# Altium PCB PCB1.PcbDoc
Units mil, origin at the board's own origin, x right, y up, seen from the top; angles counter-clockwise.
Board outline 1500 x 1500 mil, 4 copper layers (Top Layer, Int1 (GND), Int2 (GND), Bottom Layer), stack 53.912 mil thick; 25 components, 16 nets, 80 pads, 13 vias.
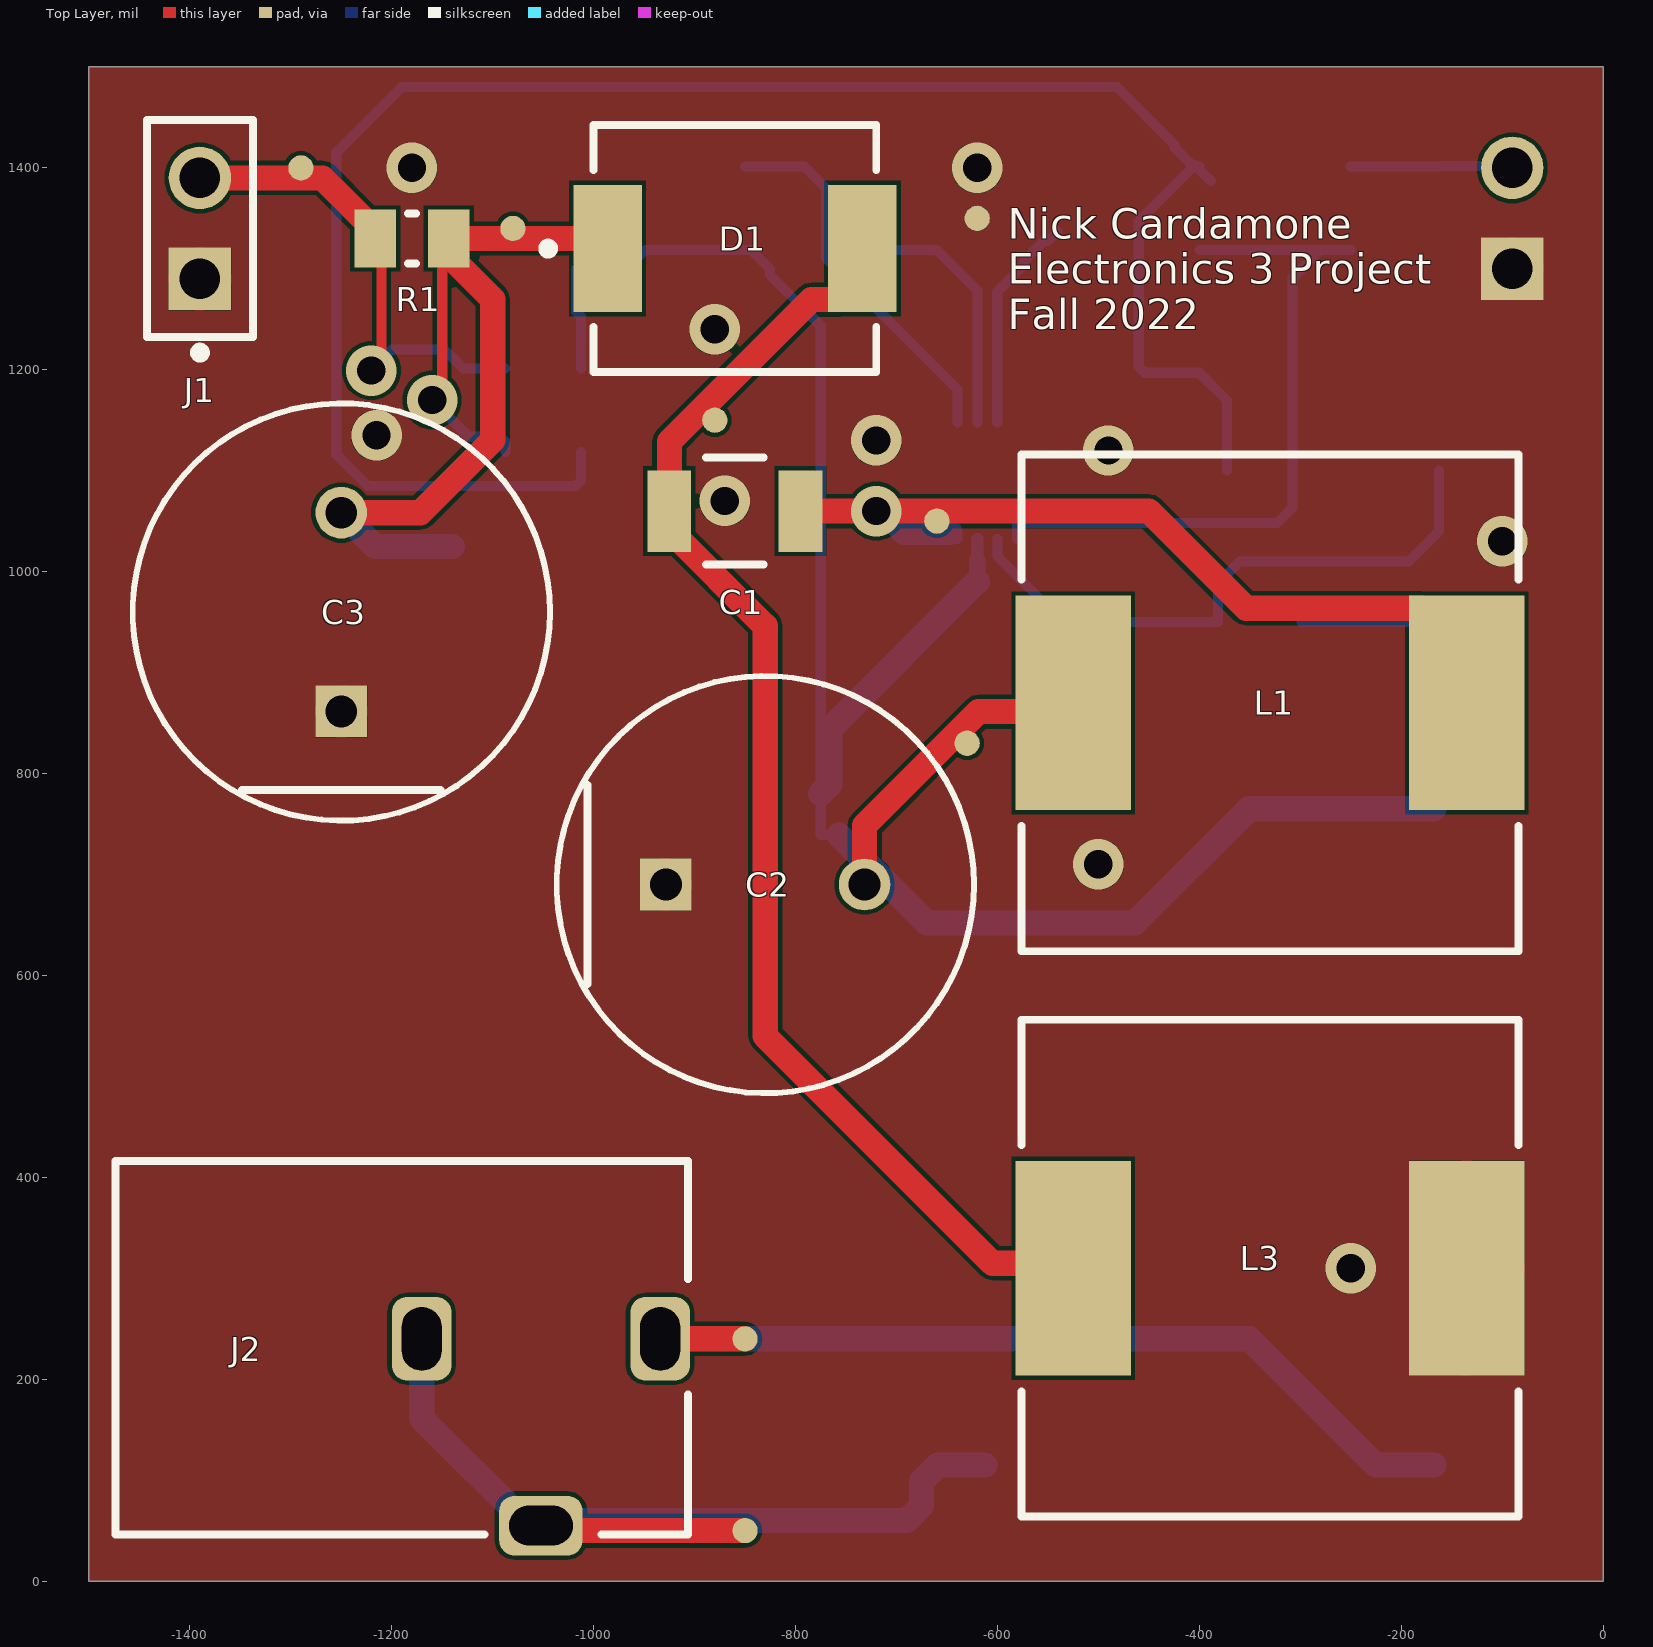
[diagram p0: Top Layer view]
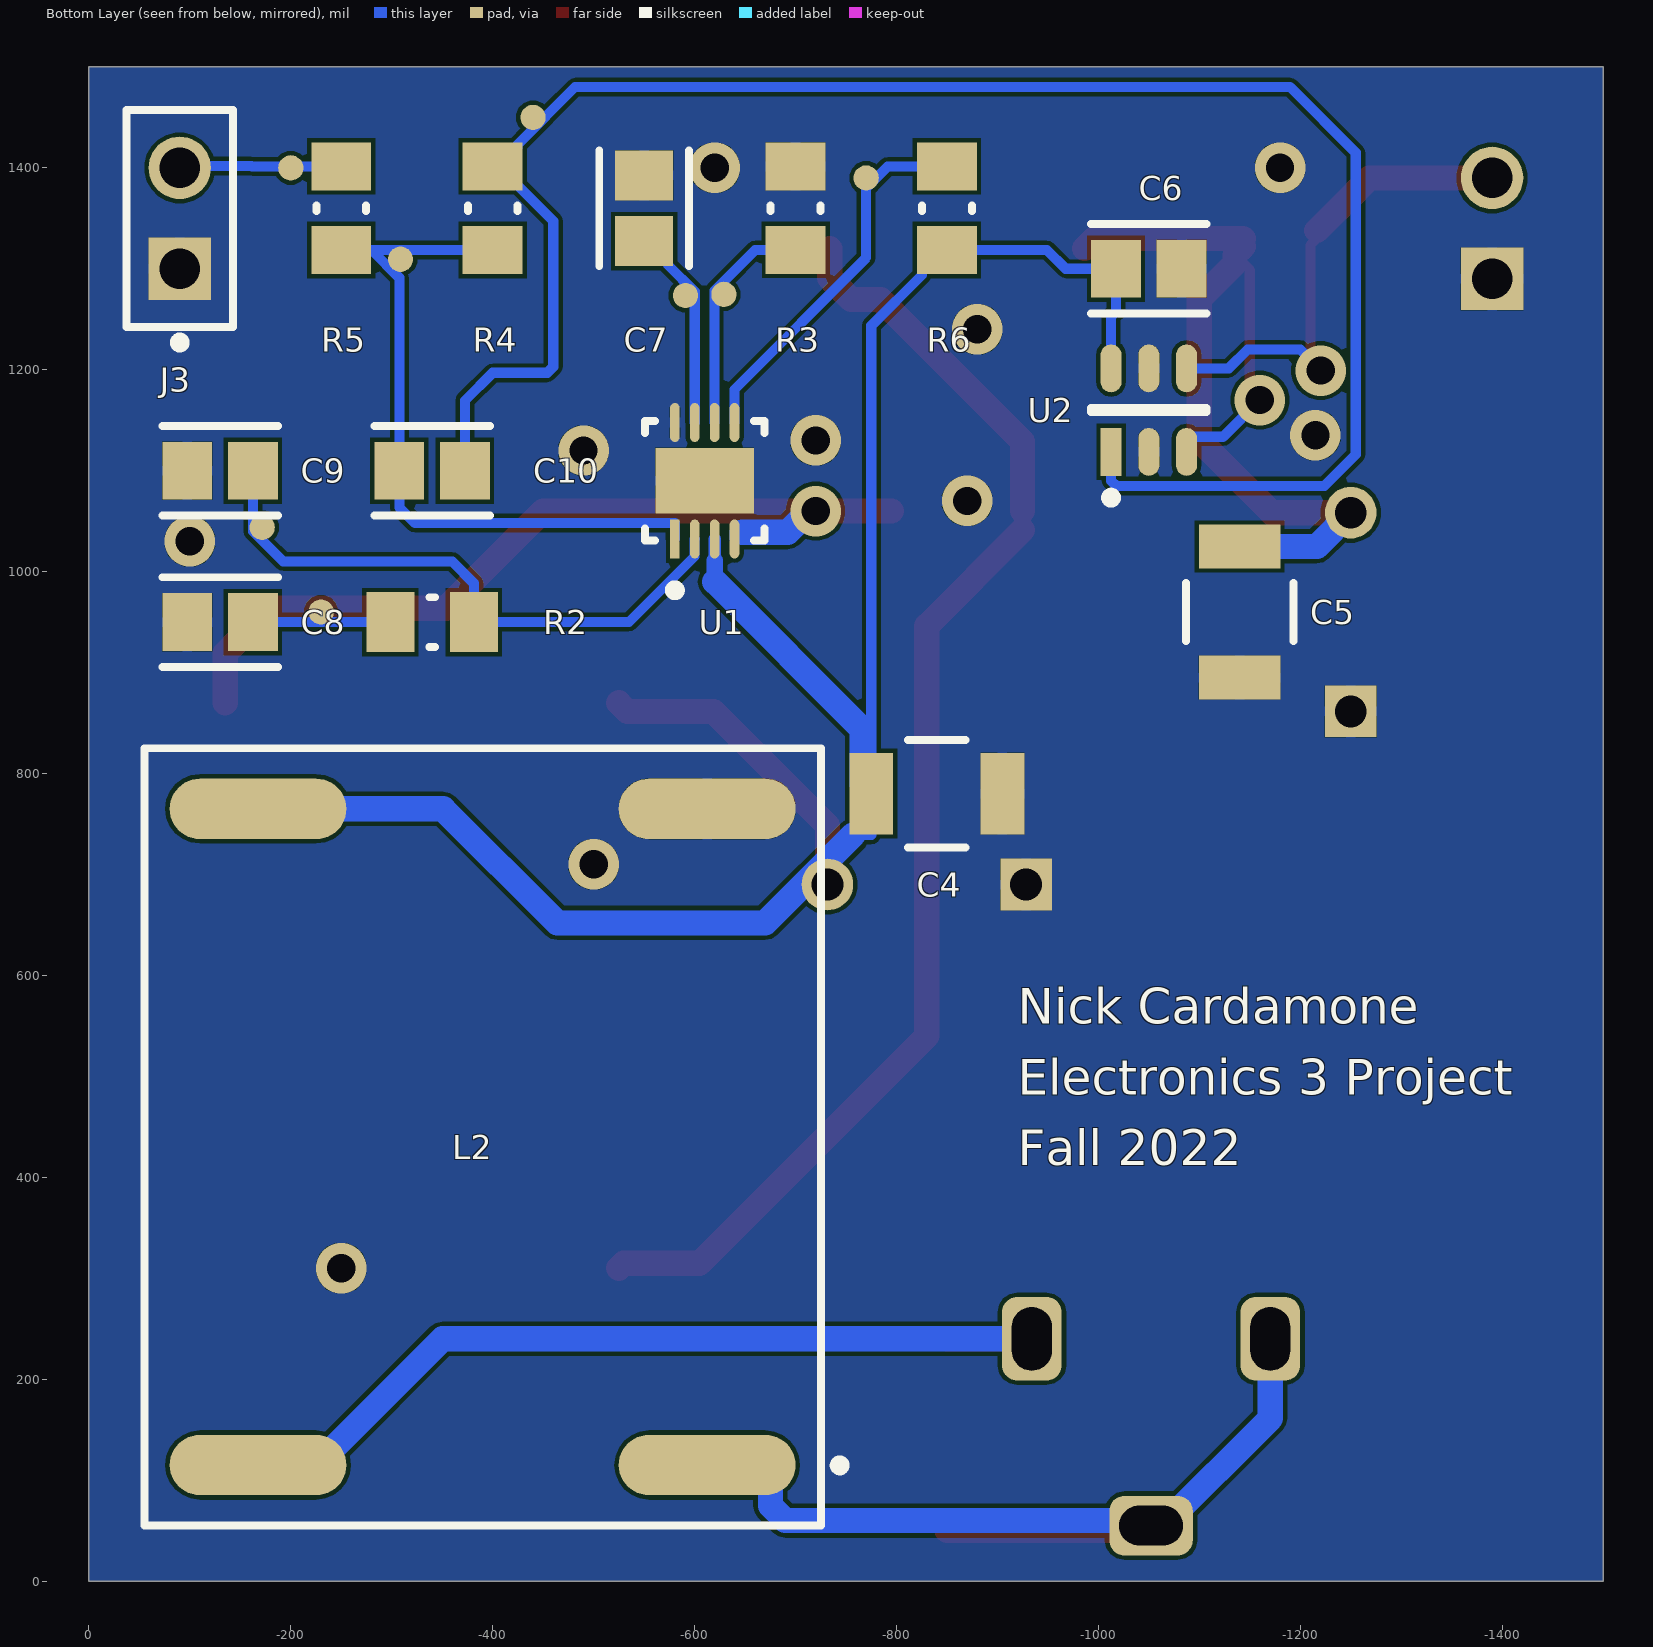
[diagram p1: Bottom Layer view, seen from below]
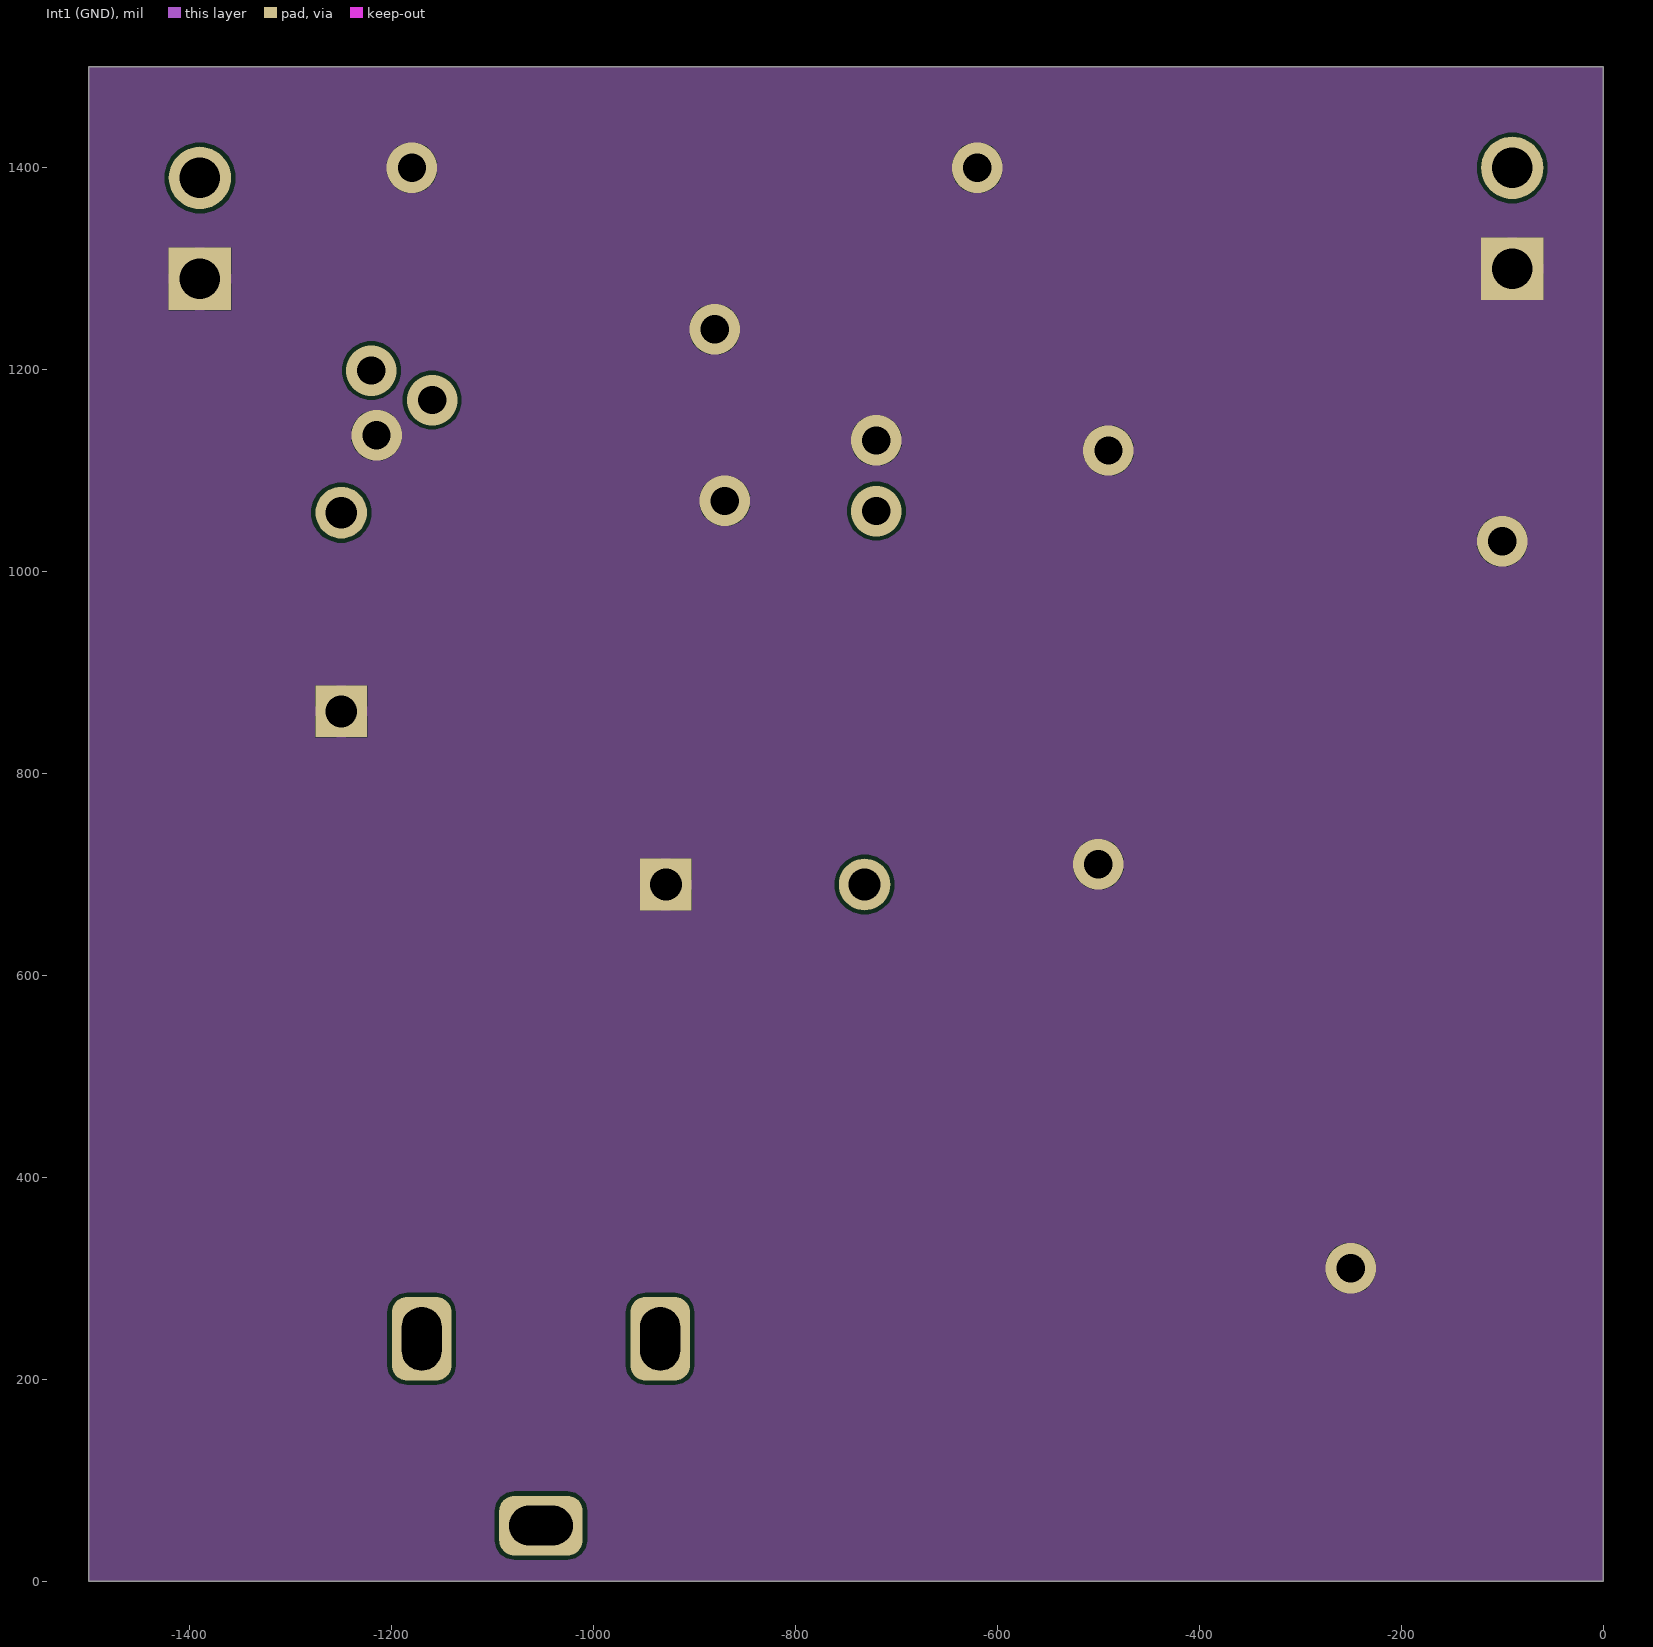
[diagram p2: Int1 (GND)]
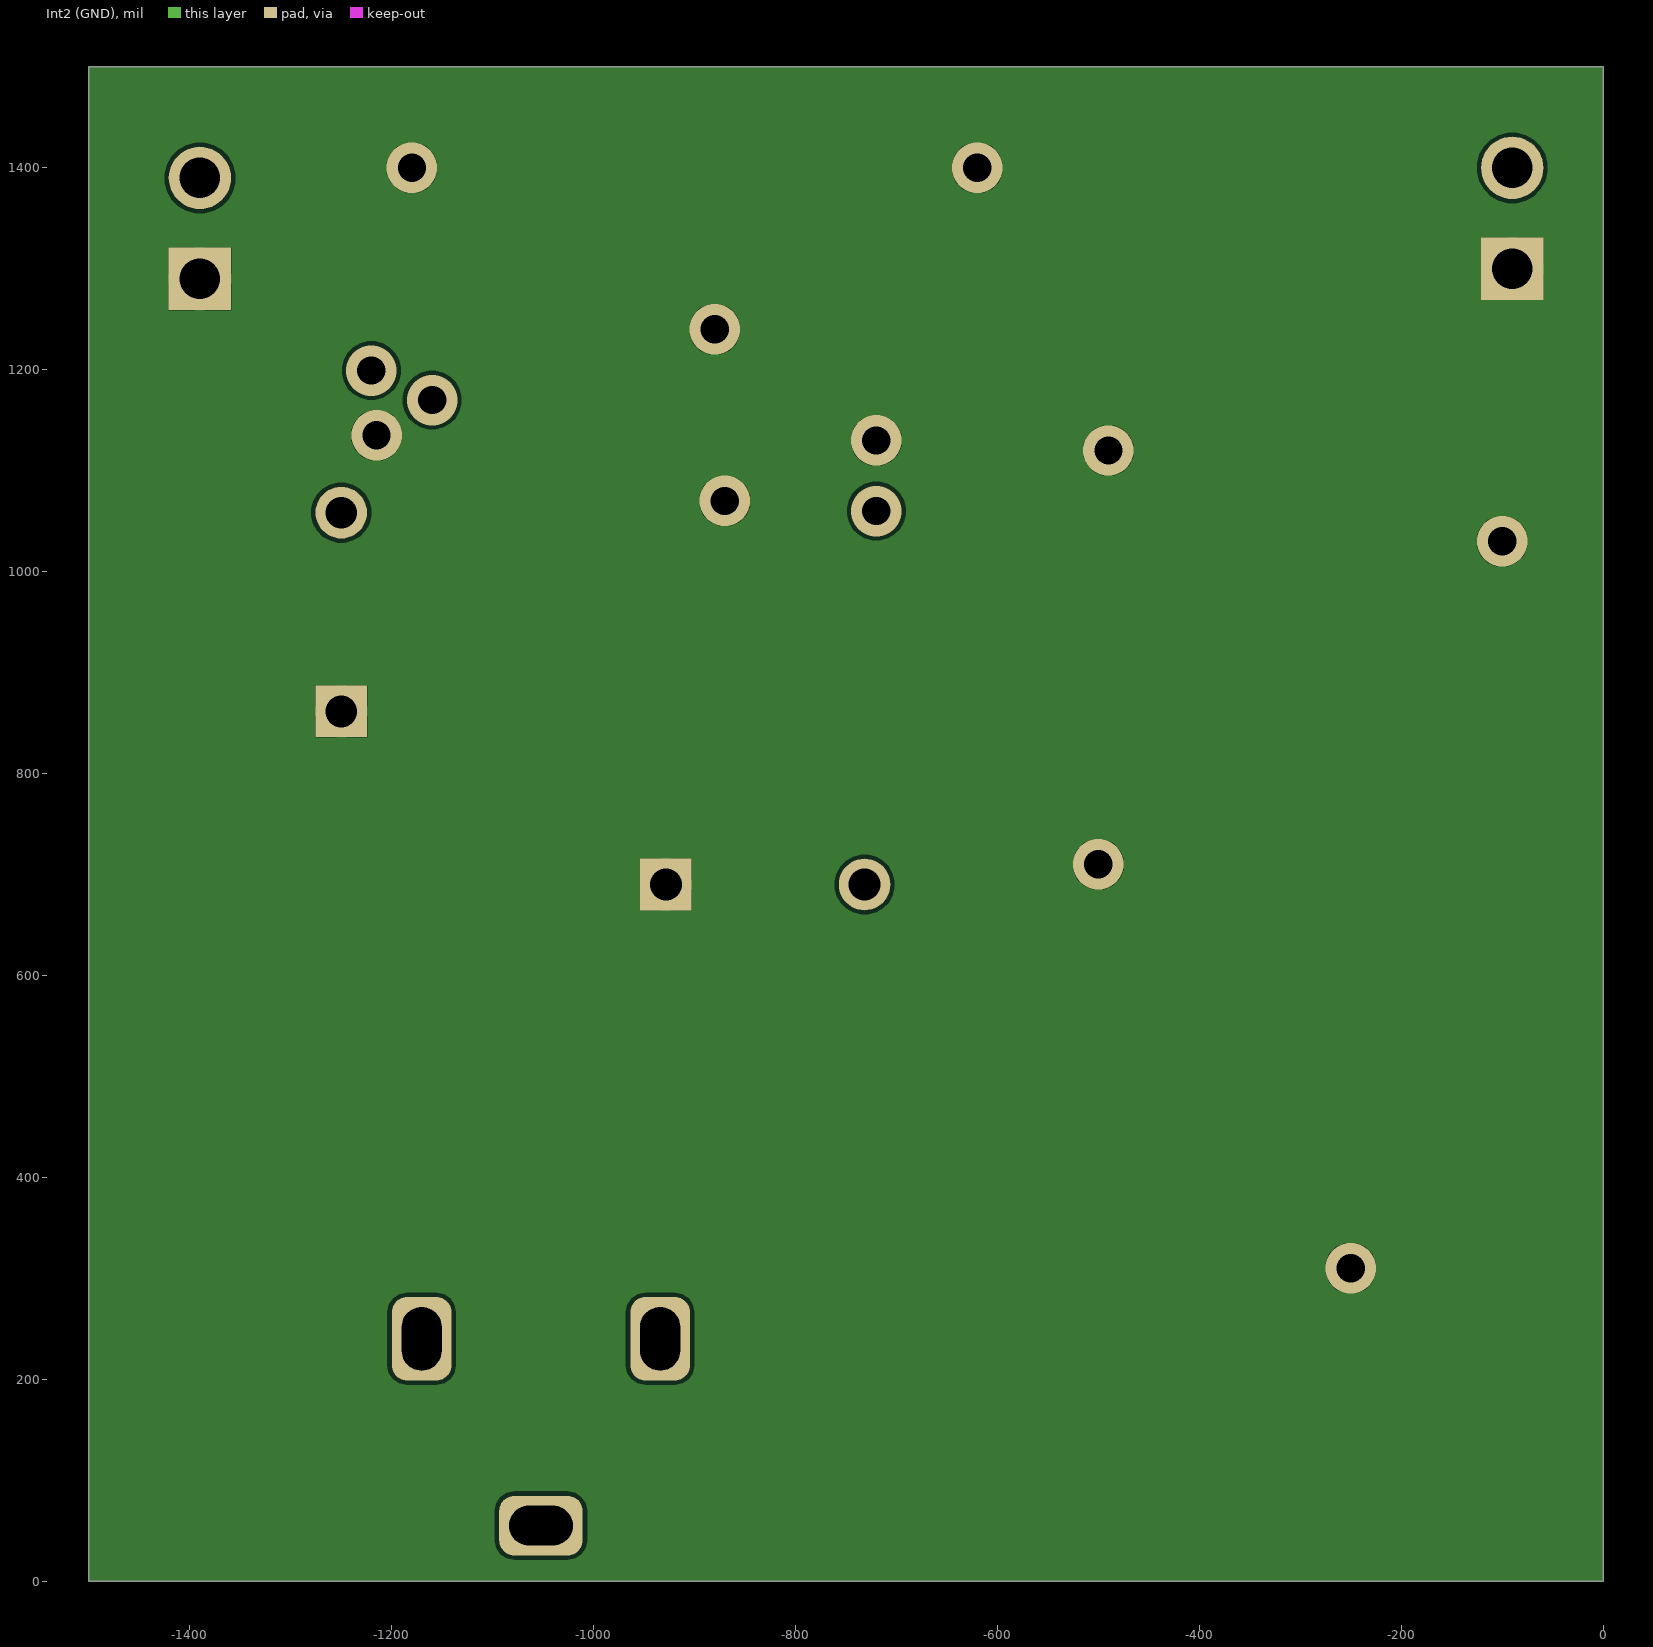
[diagram p3: Int2 (GND)]
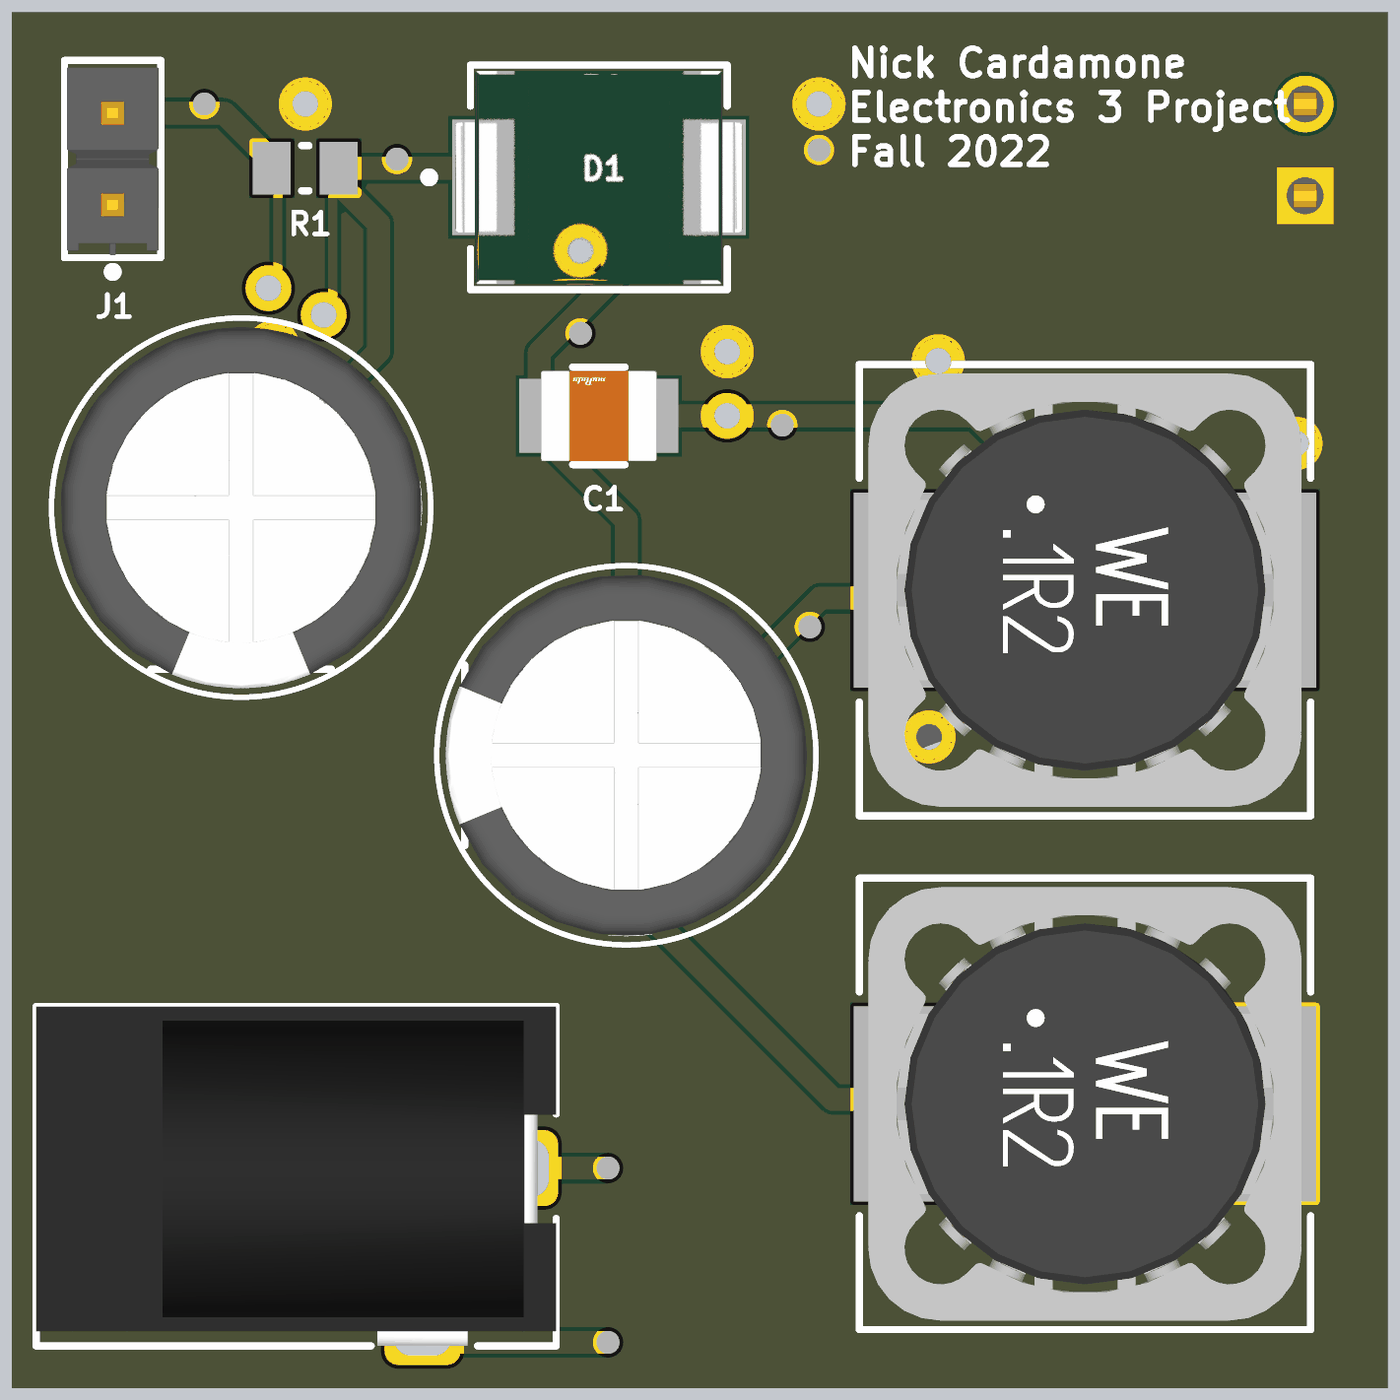
[diagram p4: 3D render of the assembled board from above, using the file's embedded part models]
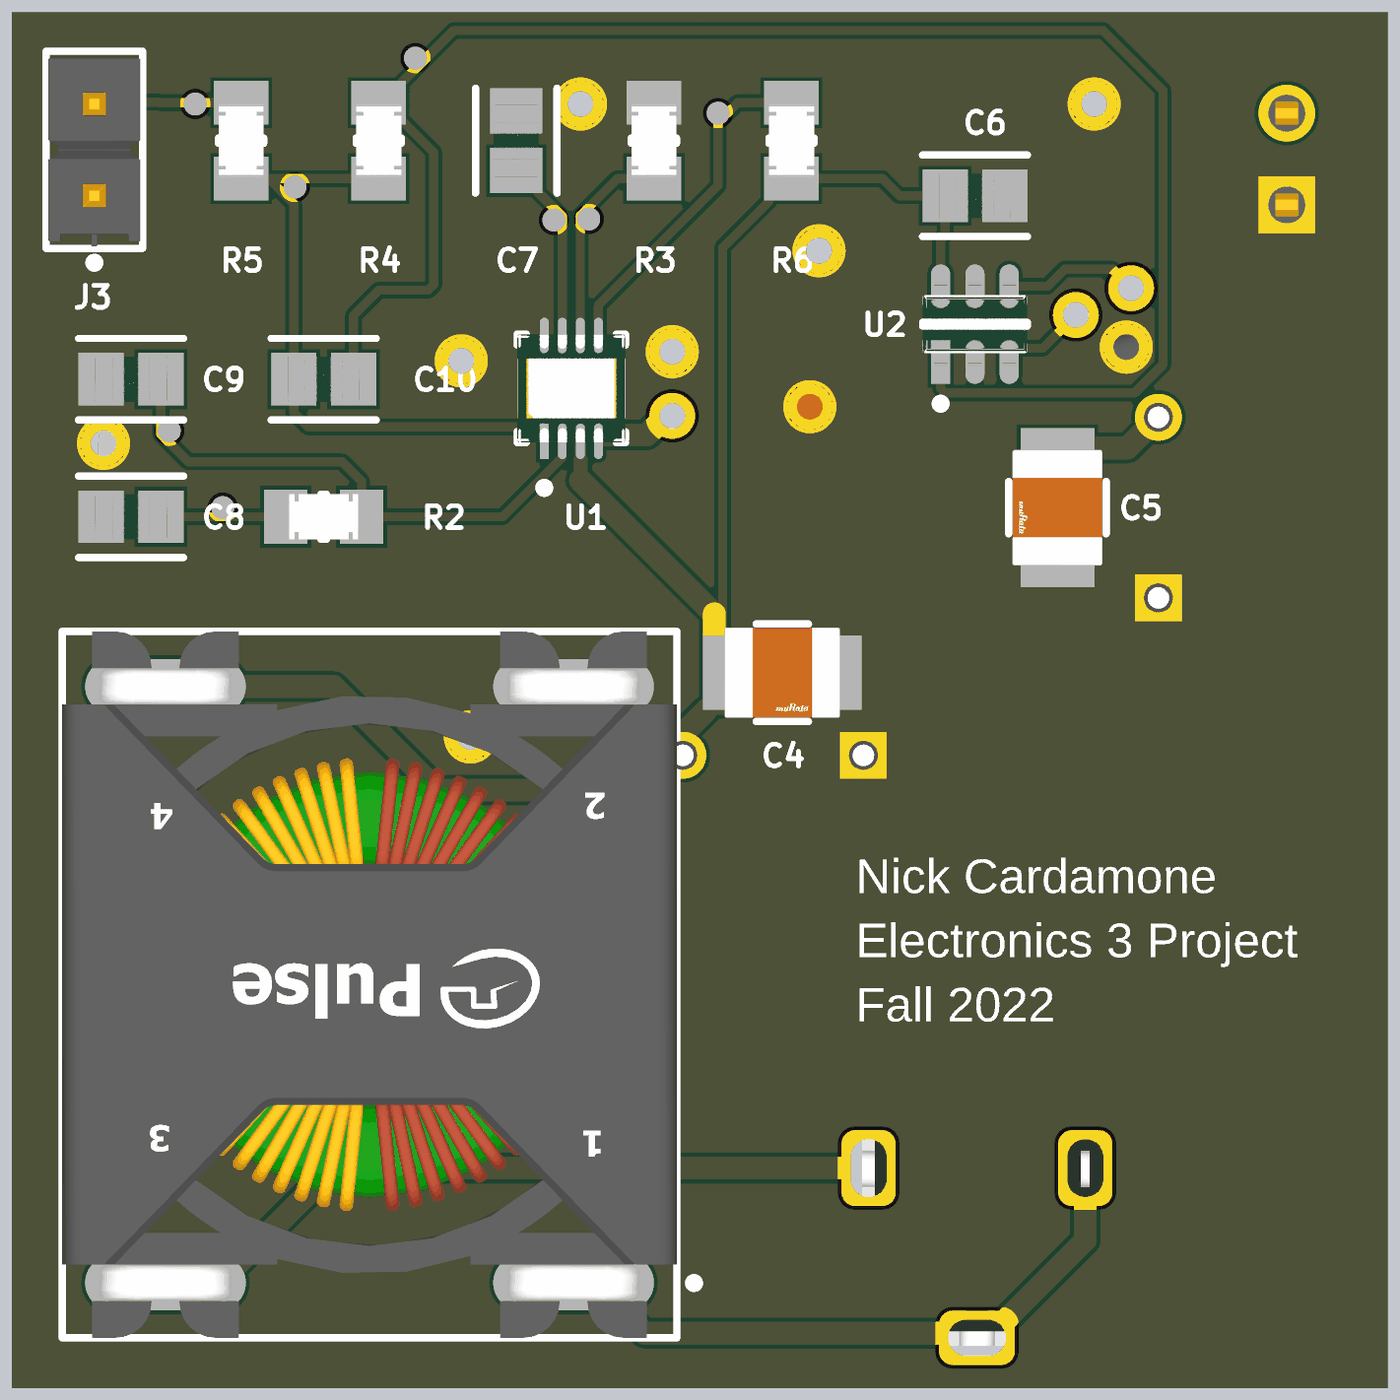
[diagram p5: 3D render of the assembled board from below, using the file's embedded part models]

## Layer stack, top to bottom
Top Solder: solder mask 1, SM-001, Dk 4
Top Layer: signal copper 1.378
Dielectric 1: prepreg 5.1, PP-017, Dk 4.3
Dielectric 2: prepreg 5.1, PP-017, Dk 4.3
Int1 (GND): signal copper 1.378
Dielectric 3: core 28, Core-039, Dk 4.8
Int2 (GND): signal copper 1.378
Dielectric 4: prepreg 5.1, PP-017, Dk 4.3
Dielectric 5: prepreg 5.1, PP-017, Dk 4.3
Bottom Layer: signal copper 1.378
Bottom Solder: solder mask 1, SM-001, Dk 4

## Board outline
-1500,0 -1500,1500 0,1500 0,0

## Design rules (kind name [scope] priority, off if disabled: settings)
Clearance [All] p1: gap=4 ignorepadtopadclearanceinfootprint=FALSE
PlaneConnect [All] p1 off: planeconnectstyle=Relief reliefexpansion=20 reliefentries=4 reliefconductorwidth=10 reliefairgap=10
PolygonConnect [All] p1 off: connectstyle=Relief reliefconductorwidth=10 reliefentries=4 polygonreliefangle="90 Angle" airgapwidth=10
RoomDefinition Sheet1 [InComponentClass('Sheet1')] p1: confinementstyle=ConfineIn formatcopy=TRUE lockcomponents=FALSE outline -1500,0 2500,0 2500,2000 -1500,2000
RoutingVias [All] p1: holewidth=28 width=50 viastyle="Through Hole" minholewidth=28 minwidth=50 maxholewidth=28 maxwidth=50
SolderMaskExpansion [All] p1: expansion=4 istentingtop=FALSE
Width [All] p1: maxlimit=100 minlimit=6 preferedwidth=10 midlayer1_minwidth=10 midlayer1_maxwidth=10 midlayer2_minwidth=10 midlayer2_maxwidth=10 minimp=50.000000 maximp=50.000000 favimp=50.000000
29 further rules are at their usual default settings.

## Components (designator, comment, footprint, x,y, rotation, side; value= is the part's Value field where it differs from the comment)
C1 "GRM32ER71J106KA12L" FP-GRM32E-0_2-0_3-MFG -860,1060 r180 top
C2 "EEUFR1H221B" FP-RAD-TH-D_10_0_5-L_16_1-MFG -830,690 r0 top
C3 "EEUFR1H221B" FP-RAD-TH-D_10_0_5-L_16_1-MFG -1250,960 r90 top
C4 "GRM32ER71J106KA12L" FP-GRM32E-0_2-0_3-MFG -840,780 r180 bottom
C5 "GRM32ER71J106KA12L" FP-GRM32E-0_2-0_3-MFG -1140,960 r270 bottom
C6 "CL21A226MQQNNNG" FP-CL21-IPC_B -1050,1300 r0 bottom
C7 "CL21A226MQQNNNG" FP-CL21-IPC_B -550,1360 r90 bottom
C8 "CL21A226MQQNNNG" FP-CL21-IPC_B -130,950 r0 bottom
C9 "CL21A226MQQNNNG" FP-CL21-IPC_B -130,1100 r0 bottom
C10 "CL21A226MQQNNNG" FP-CL21-IPC_B -340,1100 r180 bottom
D1 "ES3D-E3/57T" FP-95402-MFG -860,1320 r0 top value=45pF
J1 "TSW-102-07-L-S" FP-TSW-102-07-L-S-MFG -1390,1340 r90 top
J2 "PJ-102AH" "CUI PJ-102AH" -1190,240 r90 top
J3 "TSW-102-07-L-S" FP-TSW-102-07-L-S-MFG -90,1350 r90 bottom
L1 "744770233" WE-PD-XL -330,870 r0 top
L2 "P0351NLT" FP-P0351NLT-MFG -390,440 r0 bottom
L3 "744770233" WE-PD-XL -330,310 r0 top
R1 "CRCW080510R0FKEA" RESC2013X50X30NL20T20 -1180,1330 r180 top
R2 "CRCW080510K0FKEA" FP-CRCW0805-e3-IPC_A -340,950 r180 bottom
R3 "CRCW080510K0FKEA" FP-CRCW0805-e3-IPC_A -700,1360 r270 bottom
R4 "CRCW080510K0FKEA" FP-CRCW0805-e3-IPC_A -400,1360 r90 bottom
R5 "CRCW080510K0FKEA" FP-CRCW0805-e3-IPC_A -250,1360 r270 bottom
R6 "CRCW080510K0FKEA" FP-CRCW0805-e3-IPC_A -850,1360 r270 bottom
U1 "LT8570EDD-1#PBF" FP-DD-8-05-08-1698-IPC_A -610,1090 r90 bottom
U2 "INA181A2IDBVT" FP-DBV0006A-IPC_C -1050,1160 r90 bottom

## Footprints (in the part's own frame and the unit in brackets; to place one, negate y for a bottom-side part, rotate by r counter-clockwise, add the part's x,y. Pads: shape width x height; smd on the part's side, far side on the other; paste and mask are expansions set on the pad)
"CUI PJ-102AH" [mm] "DC Barrel Jack W/ Switch 2.0x5.5"
  rrect50% 2.1x1.5 hole 1 slot 1.6 at 0 deg: 1(0,-6.5) 2(0,-0.5)
  rrect50% 1.5x2.1 hole 1 slot 1.6 at 90 deg: 3(-4.7,-3.5)
  silkscreen extent -4.93,-7.2 4.48,7.2, body extent -4.92,-7.2 4.47,7.2, height 11
FP-95402-MFG [mm]
  rect 1.72x3.2 smd paste+0 mask+0: 1(-3.205,0) 2(3.205,0)
  silkscreen extent -4.82,-3.11 3.55,3.11, body extent -4.17,-3.21 4.17,3.21, height 0.25
FP-CL21-IPC_B [mil]
  rect 49.4x57.33 smd paste+0 mask+0: 1(-32.51,0) 2(32.51,0)
  silkscreen extent -57,-44 57,44, body extent -39,-25 39,25, height 57
FP-CRCW0805-e3-IPC_A [mil]
  rect 47.5x59.38 smd paste+0 mask+0: 1(-41.37,0) 2(41.37,0)
  silkscreen extent -3,-25 3,25, body extent -39,-25 39,25, height 20
FP-DBV0006A-IPC_C [mm]
  rect 1.205x0.53 smd paste+0 mask+0: 1(-1.05,0.95)
  rrect100% 1.205x0.53 smd paste+0 mask+0: 2(-1.05,0) 3(-1.05,-0.95) 4(1.05,-0.95) 5(1.05,0) 6(1.05,0.95)
  silkscreen extent -2.33,-1.45 0.05,1.45, body extent -1.4,-1.45 1.4,1.45, height 1.45
FP-DD-8-05-08-1698-IPC_A [mm]
  rect 0.981x0.242 smd paste+0 mask+0: 1(-1.466,0.75)
  rrect100% 0.981x0.242 smd paste+0 mask+0: 2(-1.466,0.25) 3(-1.466,-0.25) 4(-1.466,-0.75) 5(1.466,-0.75) 6(1.466,-0.25) 7(1.466,0.25) 8(1.466,0.75)
  rect 1.65x2.48 smd paste-1000 mask+0: 9(0,0)
  silkscreen extent -2.88,-1.5 1.5,1.5, body extent -1.5,-1.5 1.5,1.5, height 0.8
FP-GRM32E-0_2-0_3-MFG [mm]
  rect 1.1x2.05 smd paste+0 mask+0: 1(-1.65,0) 2(1.65,0)
  silkscreen extent -0.73,-1.35 0.73,1.35, body extent -2.3,-1.45 2.3,1.45, height 0.25
FP-P0351NLT-MFG [mm]
  rrect100% 4.45x1.52 smd paste+0 mask+0: 1(-5.65,8.255) 2(-5.65,-8.255) 3(5.65,8.255) 4(5.65,-8.255)
  silkscreen extent -9.11,-9.78 8.51,9.78, body extent -8.51,-9.78 8.51,9.78, height 9.91
FP-RAD-TH-D_10_0_5-L_16_1-MFG [mm]
  rect 1.3x1.3 hole 0.8 paste-1000 mask+0: 1(-2.5,0)
  round 1.3 hole 0.8 paste-1000 mask+0: 2(2.5,0)
  silkscreen extent -5.25,-5.25 5.25,5.25, body extent -5.35,-5.35 5.35,5.35, height 0.25
FP-TSW-102-07-L-S-MFG [mm]
  rect 1.57x1.57 hole 1.02 paste-1000 mask+0: 1(-1.27,0)
  round 1.57 hole 1.02 paste-1000 mask+0: 2(1.27,0)
  silkscreen extent -3.25,-1.34 2.73,1.34, body extent -2.83,-1.44 2.83,1.44, height 0.25
RESC2013X50X30NL20T20 [mm] "Chip Resistor, 2-Leads, Body 2.00x1.25mm, IPC Medium Density"
  rect 1.05x1.45 smd: 1(-0.925,0) 2(0.925,0)
  silkscreen extent -0.1,-0.62 0.1,0.62, body extent -1.1,-0.72 1.1,0.72, height 0.5
WE-PD-XL [mm] "SMD Inductor, 2-Leads, Body 12.0 x 12.0 mm"
  rect 2.9x5.4 smd: 1(-4.95,0) 2(4.95,0)
  silkscreen extent -6.25,-6.25 6.25,6.25, body extent -6,-6 6,6, height 7.99

## Part data
C1 C4 C5: library part CMP-2000-07458-2, "CAP CER 10UF 63V X7R 1210", Capacitance=10uF, Case Code (Imperial)=1210, Case Code (Metric)=3225, Dielectric=X7R, Dielectric Material=Ceramic, Max Operating Temperature=125°C, Min Operating Temperature=-55°C, Package Quantity=1000, Tolerance=10%, Voltage=63V, Case/Package=1210, Depth=2.5mm, Height=2.5mm, Lead Free="Lead Free", Length=3.2mm, Material=Ceramic, Mount="Surface Mount", packaging="Tape and Reel", REACH SVHC="No SVHC", RoHS Compliant=Yes, Termination=SMD/SMT, Thickness=0.106inch, Voltage Rating=63V, Voltage Rating (DC)=63V, Weight=0.00388oz, Width=2.5mm
C2 C3: library part CMP-05427-000403-1, "Aluminum Electrolytic Capacitors (Radial Lead Type) 220uF ±20% 50V", Capacitance=220uF, Case/Package=Radial, ESR (Equivalent Series Resistance)=30mR, Max Operating Temperature=105°C, Min Operating Temperature=-40°C, Package Quantity=1, Ripple Current=1.65A, Tolerance=20%, Voltage Rating=50V, Contact Plating=Tin, Diameter=10mm, Features="General Purpose", Height=16mm, Height - Seated (Max)=0.689inch, Impedance=30mR, Lead Diameter=0.6mm, Lead Free="Lead Free", Lead Pitch=5mm, Length=16mm, Life (Hours)=8000Hour, Mount="Through Hole", Number of Pins=2, packaging="Ammo Pack", Radiation Hardening=No, REACH SVHC="No SVHC", RoHS Compliant=Yes, series=FR, Termination=Radial, Voltage Rating (DC)=50V
C6 C7 C8 C9 C10: library part CMP-13271-002967-1, "CL21 Series 0805 22uF 6.3V ±20% Tolerance X5R Multilayer Ceramic Chip Capacitor", Capacitance=22uF, Case Code (Imperial)=0805, Case Code (Metric)=2012, Dielectric=X5R, Max Operating Temperature=85°C, Min Operating Temperature=-55°C, Package Quantity=3000, Tolerance=20%, Voltage=6.3V, Case/Package=0805, Depth=1.25mm, Height=1.25mm, Length=2mm, Material=Ceramic, Mount="Surface Mount", packaging="Tape and Reel", Radiation Hardening=No, Thickness=0.055inch, Voltage Rating=6.3V, Width=0.049inch
D1: library part CMP-02540-000021-1, "DIODE GEN PURP 200V 3A DO214AB", Capacitance=45pF, Forward Current=3A, manufacturer=Vishay, Max Junction Temp=+150°C, Max Repetitive Reverse Voltage=200V, Max Surge Forward Current=100A, Package=95402, Peak Reverse Current=10uA, Temperature="-55°C to +150°C", Temperature Range Low=-55°C, Automotive=No, Category=Diode, componentlink2description=Datasheet, componentlink2url=http://www.vishay.com/docs/88589/es3.pdf, Device Class L1="Discrete Semiconductors", Device Class L2=Diodes, Device Class L3="Rectifier Diodes", Digikey Description="DIODE GEN PURP 200V 3A DO214AB", Footprint Url=https://www.vishay.com/docs/95402/smc.pdf, Height=2.62mm, Lead Free=Yes, Manufacturer Part Number=ES3D-E3/57T, Mouser Description="Rectifiers 3.0 Amp 200V 20ns", Octopart=https://octopart.com/es3d-e3%2F57t-vishay-39550290, Reverse Voltage=200V, RoHS=TRUE, Standoff Height=0mm, Temperature Range High=+150°C
J1 J3: library part CMP-02766-001428-1, "CONN HEADER VERT 2POS 2.54MM", Color=Black, Current Rating=7.6A, Max Operating Temperature=125°C, Max Voltage Rating (AC)=550V, Min Operating Temperature=-55°C, Package Quantity=1, Connector Type="Male Pin", Contact Material=Bronze, Contact Mating Length=0.23inch, Contact Plating=Gold, Contact Type="Male Pin", Depth=2.54mm, Gender=Male, Housing Color=Black, Housing Material=Polyester, Lead Free="Lead Free", Length=5.08mm, Max Current Rating=7.6A, Mount="Through Hole", Number of Contacts=2, Number of Positions=2, Number of Rows=1, Orientation=Straight, packaging=Bulk, Pitch=2.54mm, Radiation Hardening=No, REACH SVHC="No SVHC", RoHS Compliant=Yes, series=TSW, Termination=Solder, Voltage Rating=550V, Width=2.54mm
J2: "CONN PWR JACK 2X5.5MM SOLDER", Current Rating (Amps)=5A, manufacturer="CUI Devices", Material Flammability Rating="UL94 V-0", Supplier Part Number 1=CP-102AH-ND, Voltage - Rated=24VDC, Actual Diameter="0.079\" (2.00mm ID), 0.256\" (6.50mm OD)", componentlink1description=Datasheet, componentlink1url=https://www.cuidevices.com/product/resource/digikeypdf/pj-102ah.pdf, componentlink2description="DigiKey Link", componentlink2url=//digikey.com/product-detail/en/cui-devices/PJ-102AH/CP-102AH-ND/408448, Connector Type=Jack, Gender=Male, Industry Recognized Mating Diameter="2.00mm ID (0.079\"), 5.50mm OD (0.217\")", Internal Switch(s)="Single Switch, Normally Closed", lastupdated="2019-12-16 7:01:27 PM", Lifecycle Status=0, Mating Length/Depth="0.354\" (9.00mm)", Minimum Order=1, Mounting Type="Through Hole, Right Angle", Number of Positions/Contacts="2 Conductors, 3 Contacts", packaging=Tray, Part Number=PJ-102AH, Part Status=Active, price=0.76, series=-, Shielding=Unshielded, Supplier 1=DigiKey, Termination=Solder
L1 L3: library part CMP-0227-00189-1, "SMD-Shielded Power Inductor WE-PD, L = 330 µH", Inductance="330 ÂµH", componentlink1description="Manufacturer Link", componentlink1url=http://www.we-online.com, componentlink2description=Datasheet, componentlink2url=http://www.we-online.de/katalog/media/pdf/744770233.pdf, DatasheetVersion="ver 5, Oct-2004", PackageDescription="SMD Inductor, 2-Leads, Body 12.0 x 12.0 mm", PackageReference=WE-PD-XL, PackageVersion=2004
L2: library part CMP-16296-000003-1, "COMMON MODE CHOKE 2.8A 2LN SMD", Case/Package=SMD/SMT, Current=2.8A, DC Resistance (DCR)=80mR, Inductance=1.47mH, Max Operating Temperature=120°C, Min Operating Temperature=-40°C, Package Quantity=1, Tolerance=35%, DC Current=2.8A, Depth=17.02mm, Height=9.91mm, Length=19.56mm, Max DC Current=2.8A, Military Standard=Not, Mount="Surface Mount", Number of Lines=2, Number of Pins=50, packaging="Tape and Reel", Radiation Hardening=No, REACH SVHC="No SVHC", series=-, Shielding=Unshielded, Termination=SMD/SMT, Width=0.67inch
R1: library part CMP-2001-04915-1, manufacturer="Vishay Dale", Part Number=CRCW080510R0FKEA
R2 R3 R4 R5 R6: library part CMP-2001-04908-2, "RES Thick Film, 10kΩ, 1%, 0.125W, 100ppm/°C, 0805", Case Code (Imperial)=0805, Case Code (Metric)=2012, Max Operating Temperature=155°C, Min Operating Temperature=-55°C, Package Quantity=5000, Power Rating=125mW, Resistance=10kR, Temperature Coefficient=100ppm/°C, Tolerance=1%, Voltage Rating=150V, Case/Package=0805, Composition="Thick Film", Contact Plating=Tin, Depth=1.25mm, Height=0.45mm, Lead Free="Lead Free", Length=2mm, Military Standard=Not, packaging="Tape and Reel", Radiation Hardening=No, Termination=SMD/SMT, Voltage Rating (DC)=150V, Weight=0.000194oz, Width=1.25mm
U1: library part CMP-09139-000130-1, "IC REG MULT CONFG ADJ 375MA 8DFN", Case/Package=DFN, Max Input Voltage=40V, Max Operating Temperature=125°C, Max Output Voltage=65V, Min Input Voltage=2.55V, Min Operating Temperature=-40°C, Min Output Voltage=1.204V, Output Current=375mA, Switching Frequency=1.5MHz, Mount="Surface Mount", Number of Outputs=1, Number of Pins=8, Output Type=Adjustable, Output Voltage=65V, packaging=Rail/Tube, REACH SVHC="No SVHC", RoHS Compliant=Yes, Synchronous Rectifier=No, Topology=Boost
U2: library part CMP-04895-000249-1, "IC CURR SENSE 1 CIRCUIT SOT23-6", Case/Package=SOT-23-6, Max Operating Temperature=125°C, Min Operating Temperature=-40°C, Operating Supply Current=260uA, -3db Bandwidth=350kHz, Mount="Surface Mount", Number of Circuits=1, packaging="Tape and Reel", RoHS Compliant=Yes, Slew Rate=2V/µs

## Free pads (board coordinates)
  round 25 smd: TestPoint(-1290,1400) TestPoint(-1080,1340) TestPoint(-880,1150) TestPoint(-850,50) TestPoint(-850,240) TestPoint(-660,1050) TestPoint(-630,830) TestPoint(-620,1350)
  round 25 smd far side: TestPoint(-770,1390) TestPoint(-629.02,1274.67) TestPoint(-590.98,1273.53) TestPoint(-440,1450) TestPoint(-308.69,1309.45) TestPoint(-230,960) TestPoint(-200,1400) TestPoint(-171.69,1043.8)

## Via types
v1: diameter 50, hole 28, Top Layer to Bottom Layer, 13 vias

## Nets (pads, with @x,y where several pads share a name; then routed paths per layer and width w, separated by ;. In a path a pad name is that pad's centre, name@x,y a point inside that pad or via, vN(x,y) a via of type N, cw(c..) or ccw(c..) an arc to the next point about the centre after c; other vN are vias at no path point)
GND: C2.1 C3.1 C4.2 C5.2 C6.1 C7.2 C8.2 C9.2 J1.1 J3.1 L2.2 L3.2 pad.TestPoint@-620,1350 R3.1 U1.8 U1.9 U2.2 U2.5
  other v1: -250,310 -500,710 -100,1030 -870,1070 -490,1120 -720,1130 -1215,1135.01 -880,1240 -1180,1400 -620,1400
NetC1_1: C1.1 L1.2 pad.TestPoint@-660,1050 U1.4 | length 863.4
  Top Layer w25: C1.1 v1(-720,1060) -450,1060 -353.8,963.8 -179.7,963.8 -135.12,919.21 L1.2
  Bottom Layer w10: -647.25,1039.11 -639.53,1039.11 U1.4
  Bottom Layer w25: v1(-720,1060) -713.24,1060 -692.35,1039.11 -647.25,1039.11
NetC1_2: C1.2 D1.2 L3.1 pad.TestPoint@-880,1150 | length 1316
  Top Layer w10: C1.2@-924.96,1041.3 C1.2
  Top Layer w25: C1.2@-924.96,1041.3 -830,946.34 -830,540 -604.82,314.82 -529.71,314.82 L3.1 ; C1.2 -924.96,1128.86 -784.31,1269.51 -755.18,1269.51 -733.82,1290.87 D1.2
NetC3_2: C3.2 C5.1 D1.1 pad.TestPoint@-1080,1340 R1.1 U2.3 | length 925
  Top Layer w10: v1(-1160,1170) -1160,1180.82 -1150,1190.82 -1150,1299 R1.1@-1143.58,1305.41 ; R1.1@-1143.58,1322.13 R1.1
  Top Layer w25: C3.2 -1171.57,1058.43 -1100,1130 -1100,1270 -1135.41,1305.41 -1135.41,1313.96 R1.1@-1143.58,1322.13 ; R1.1 -996.18,1330 D1.1
  Bottom Layer w10: v1(-1160,1170) -1123.66,1133.66 -1092.42,1133.66 -1087.4,1128.64 U2.3
  Bottom Layer w25: C3.2 -1216.53,1024.96 C5.1
NetC7_1: C7.1 pad.TestPoint@-590.98,1273.53 U1.7 | length 216.1
  Bottom Layer w10: U1.7 -600.16,1277.33 -573.67,1303.82 -573.67,1307.79 -553.97,1327.49 C7.1 C7.1@-540.68,1336.81
NetC8_1: C8.1 pad.TestPoint@-230,960 R2.1 | length 136.1
  Bottom Layer w10: R2.1 C8.1
NetC9_1: C9.1 pad.TestPoint@-171.69,1043.8 R2.2 U1.2 | length 601.7
  Bottom Layer w10: U1.2 -599.93,1032.08 -599.93,1014.95 -534.98,950 R2.2 -381.37,988.63 -360,1010 -192.51,1010 -162.51,1040 C9.1
NetC10_1: C10.1 pad.TestPoint@-308.69,1309.45 R4.1 R5.2 U1.1 | length 711.6
  Bottom Layer w10: U1.1 -580.47,1048 -323,1048 -307.49,1063.51 C10.1 -307.49,1291.14 -280,1318.63 ; R4.1 -280,1318.63 ; R5.2 -256.74,1318.63 -280,1318.63
NetC10_2: C10.2 pad.TestPoint@-440,1450 R4.2 U2.1 | length 1916.3
  Bottom Layer w10: U2.1 -1012.6,1090 -1017.6,1085 -1224,1085 -1255,1116 -1255,1415 -1190,1480 -481.63,1480 -424.69,1423.06 -424.69,1420.12 -407.44,1402.87 -404.5,1402.87 R4.2@-388.55,1386.92 ; R4.2 -406,1401.37 -460,1347.37 -460,1293.79 -460,1290 -460,1280 -460,1202.86 -454.14,1197 -400,1197 -372.51,1169.51 C10.2
NetJ1_2: J1.2 pad.TestPoint@-1290,1400 R1.2 U2.4 | length 490.2
  Top Layer w10: v1(-1220.21,1199.19) -1220.21,1210.02 -1210,1220.22 -1210,1323.58 R1.2 R1.2@-1216.42,1337.87
  Top Layer w25: J1.2 -1268.54,1390 R1.2@-1216.42,1337.87
  Bottom Layer w10: v1(-1220.21,1199.19) -1220.21,1199.79 -1200,1220 -1147.84,1220 -1129.2,1201.36 U2.4
NetJ2_1: J2.1 L2.3 pad.TestPoint@-850,240 | length 902.4
  Top Layer w25: J2.1 pad.TestPoint@-850,240
  Bottom Layer w25: J2.1 -930.4,240 -350.24,240 -225.24,115 L2.3
NetJ2_2: J2.2 J2.3 L2.1 pad.TestPoint@-850,50 | length 924
  Top Layer w25: J2.3 -1047.24,50 pad.TestPoint@-850,50
  Bottom Layer w25: J2.2 -1170.31,161.26 -1064.02,54.96 J2.3 -1047.16,60 -689.75,60 -675.11,74.64 -675.11,98.9 -659.01,115 L2.1
NetJ3_2: J3.2 pad.TestPoint@-200,1400 R5.1 | length 161.1
  Bottom Layer w10: R5.1 -161.63,1401.37 -161,1402 -92,1402 J3.2
NetR3_2: pad.TestPoint@-629.02,1274.67 R3.2 U1.6 | length 227.6
  Bottom Layer w10: R3.2 -660,1318.63 -619.84,1278.47 U1.6
NetR6_1: pad.TestPoint@-770,1390 R6.1 U1.5 | length 375.2
  Bottom Layer w10: R6.1 -791.37,1401.37 -770,1380 -770,1311 -639.53,1180.53 U1.5
VCC: C2.2 C4.1 C6.2 L1.1 L2.4 pad.TestPoint@-630,830 R6.2 U1.3 U2.6 | length 2212.4
  Top Layer w25: C2.2 -731.57,748.43 -618.66,861.34 -533.55,861.34 L1.1
  Bottom Layer w10: U2.6 -1012.6,1252.6 -1017.49,1257.49 C6.2 -967.63,1300 -949,1318.63 R6.2 -844.06,1318.63 -825.31,1299.88 -825.31,1293.94 -775.04,1243.67 C4.1 -775.04,739 -757,739
  Bottom Layer w12: -620,1011.07 -620,1032.14 U1.3
  Bottom Layer w16: -620,990 -620,1011.07
  Bottom Layer w25: C4.1 -765.89,789.15 -765.89,844.11 -620,990 ; -757,739 -670,652 -464,652 -351,765 L2.4

## Polygon pours and split planes (outlines as drawn)
GND on Int2 (GND) "NONET_L01_P-001" (solid, pour order 3): -1500,1500 -1500,0 0,0 0,1500
GND on Int1 (GND) "NONET_L01_P-001" (solid, pour order 2): -1500,1500 -1500,0 0,0 0,1500
GND on Bottom Layer "NONET_L01_P-001" (solid, pour order 1): 0,1500 0,0 -1500,0 -1500,1500
GND on Top Layer "GND_L01_P000" (solid, pour order 0): -1500,1500 -1500,0 0,0 0,1500

## Silkscreen, mask and mechanical layers (free items; w line width, h text height)
Top Overlay:
  text "Nick Cardamone / Electronics 3 Project / Fall 2022" at -590,1240 h30
Bottom Overlay:
  text "Nick Cardamone" at -920,540 h60
  text "Electronics 3 Project" at -920,470 h60
  text "Fall 2022" at -920,400 h60
Mechanical 1:
  the board outline again, w10
Bottom Assembly:
  the board outline again, w10